# Altium PCB CRYSTAL-SMD_L3.2-W1.5.pcbdoc
Units mm, origin at the board's own origin, x right, y up, seen from the top; angles counter-clockwise.
Board outline 16.27 x 14.98 mm, 2 copper layers (Top Layer, Bottom Layer), stack 0 mm thick; 1 components, 0 nets, 2 pads, 0 vias.
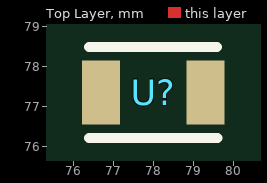
[diagram p0: Top Layer view]
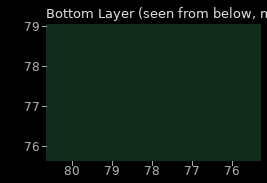
[diagram p1: Bottom Layer view, seen from below]

## Layer stack, top to bottom
Top Layer: signal copper (thickness not stored)
Bottom Layer: signal copper (thickness not stored)

## Board outline
86.116,69.85 69.85,69.85 69.85,84.831 86.116,84.831

## Components (designator, comment, footprint, x,y, rotation, side; value= is the part's Value field where it differs from the comment)
U? "" CRYSTAL-SMD_L3.2-W1.5 77.983,77.34 r0 top

## Footprints (in the part's own frame and the unit in brackets; to place one, negate y for a bottom-side part, rotate by r counter-clockwise, add the part's x,y. Pads: shape width x height; smd on the part's side, far side on the other; paste and mask are expansions set on the pad)
CRYSTAL-SMD_L3.2-W1.5 [mm]
  rect 0.95x1.6 smd: 1(-1.308,0) 2(1.308,0)
  silkscreen extent -1.6,-1.14 1.6,1.14

## Nets (pads, with @x,y where several pads share a name; then routed paths per layer and width w, separated by ;. In a path a pad name is that pad's centre, name@x,y a point inside that pad or via, vN(x,y) a via of type N, cw(c..) or ccw(c..) an arc to the next point about the centre after c; other vN are vias at no path point)
pads on no net: U?.1 U?.2